# Altium PCB PCB2.PcbDoc
Units mil, origin at the board's own origin, x right, y up, seen from the top; angles counter-clockwise.
Board outline 6000 x 4000 mil, 2 copper layers (Top Layer, Bottom Layer); 31 components, 30 nets, 108 pads, 17 vias.
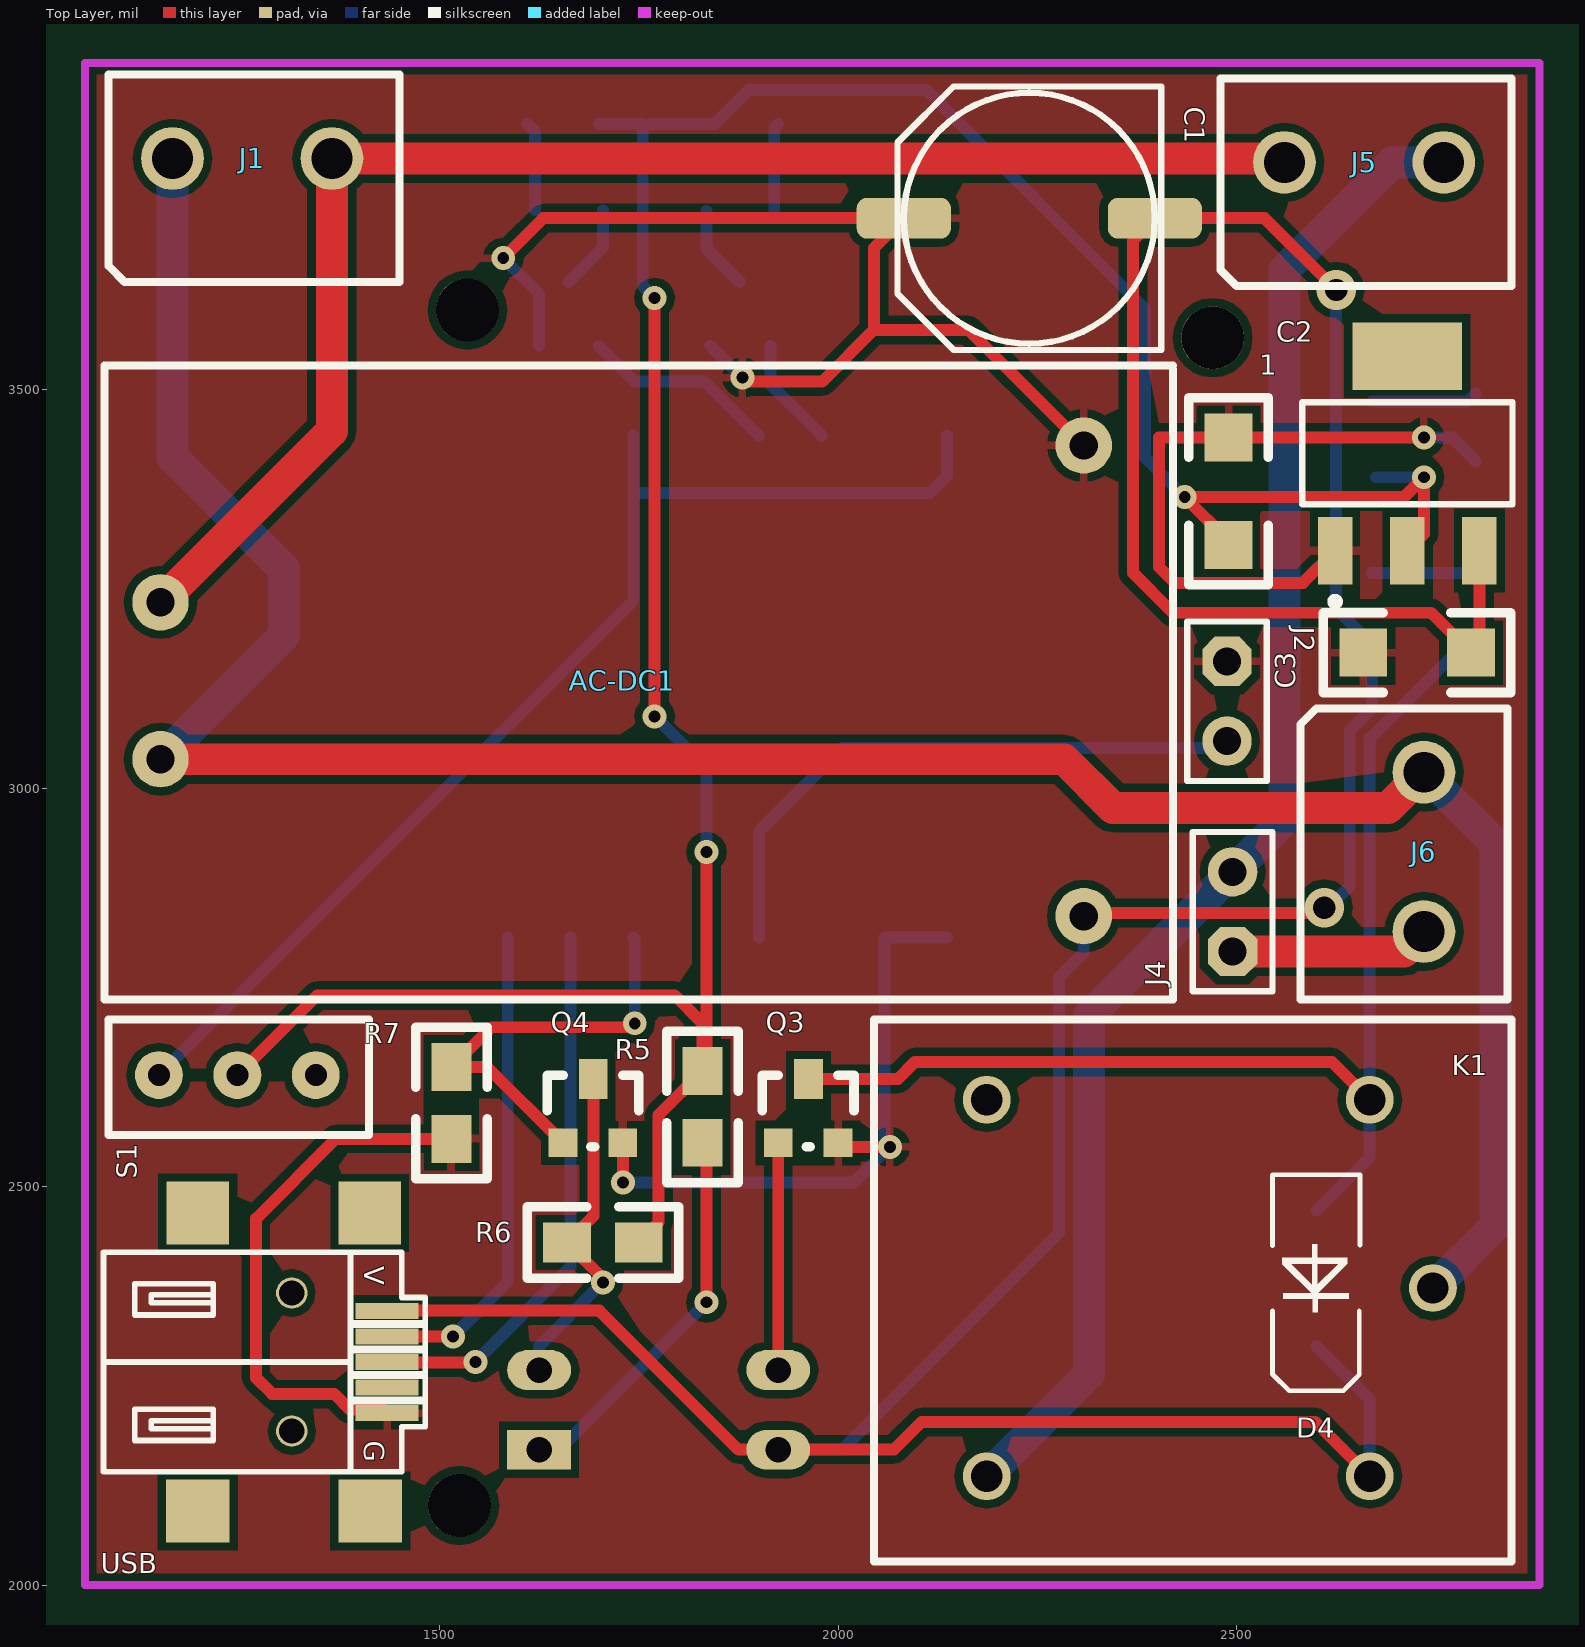
[diagram p0: Top Layer view]
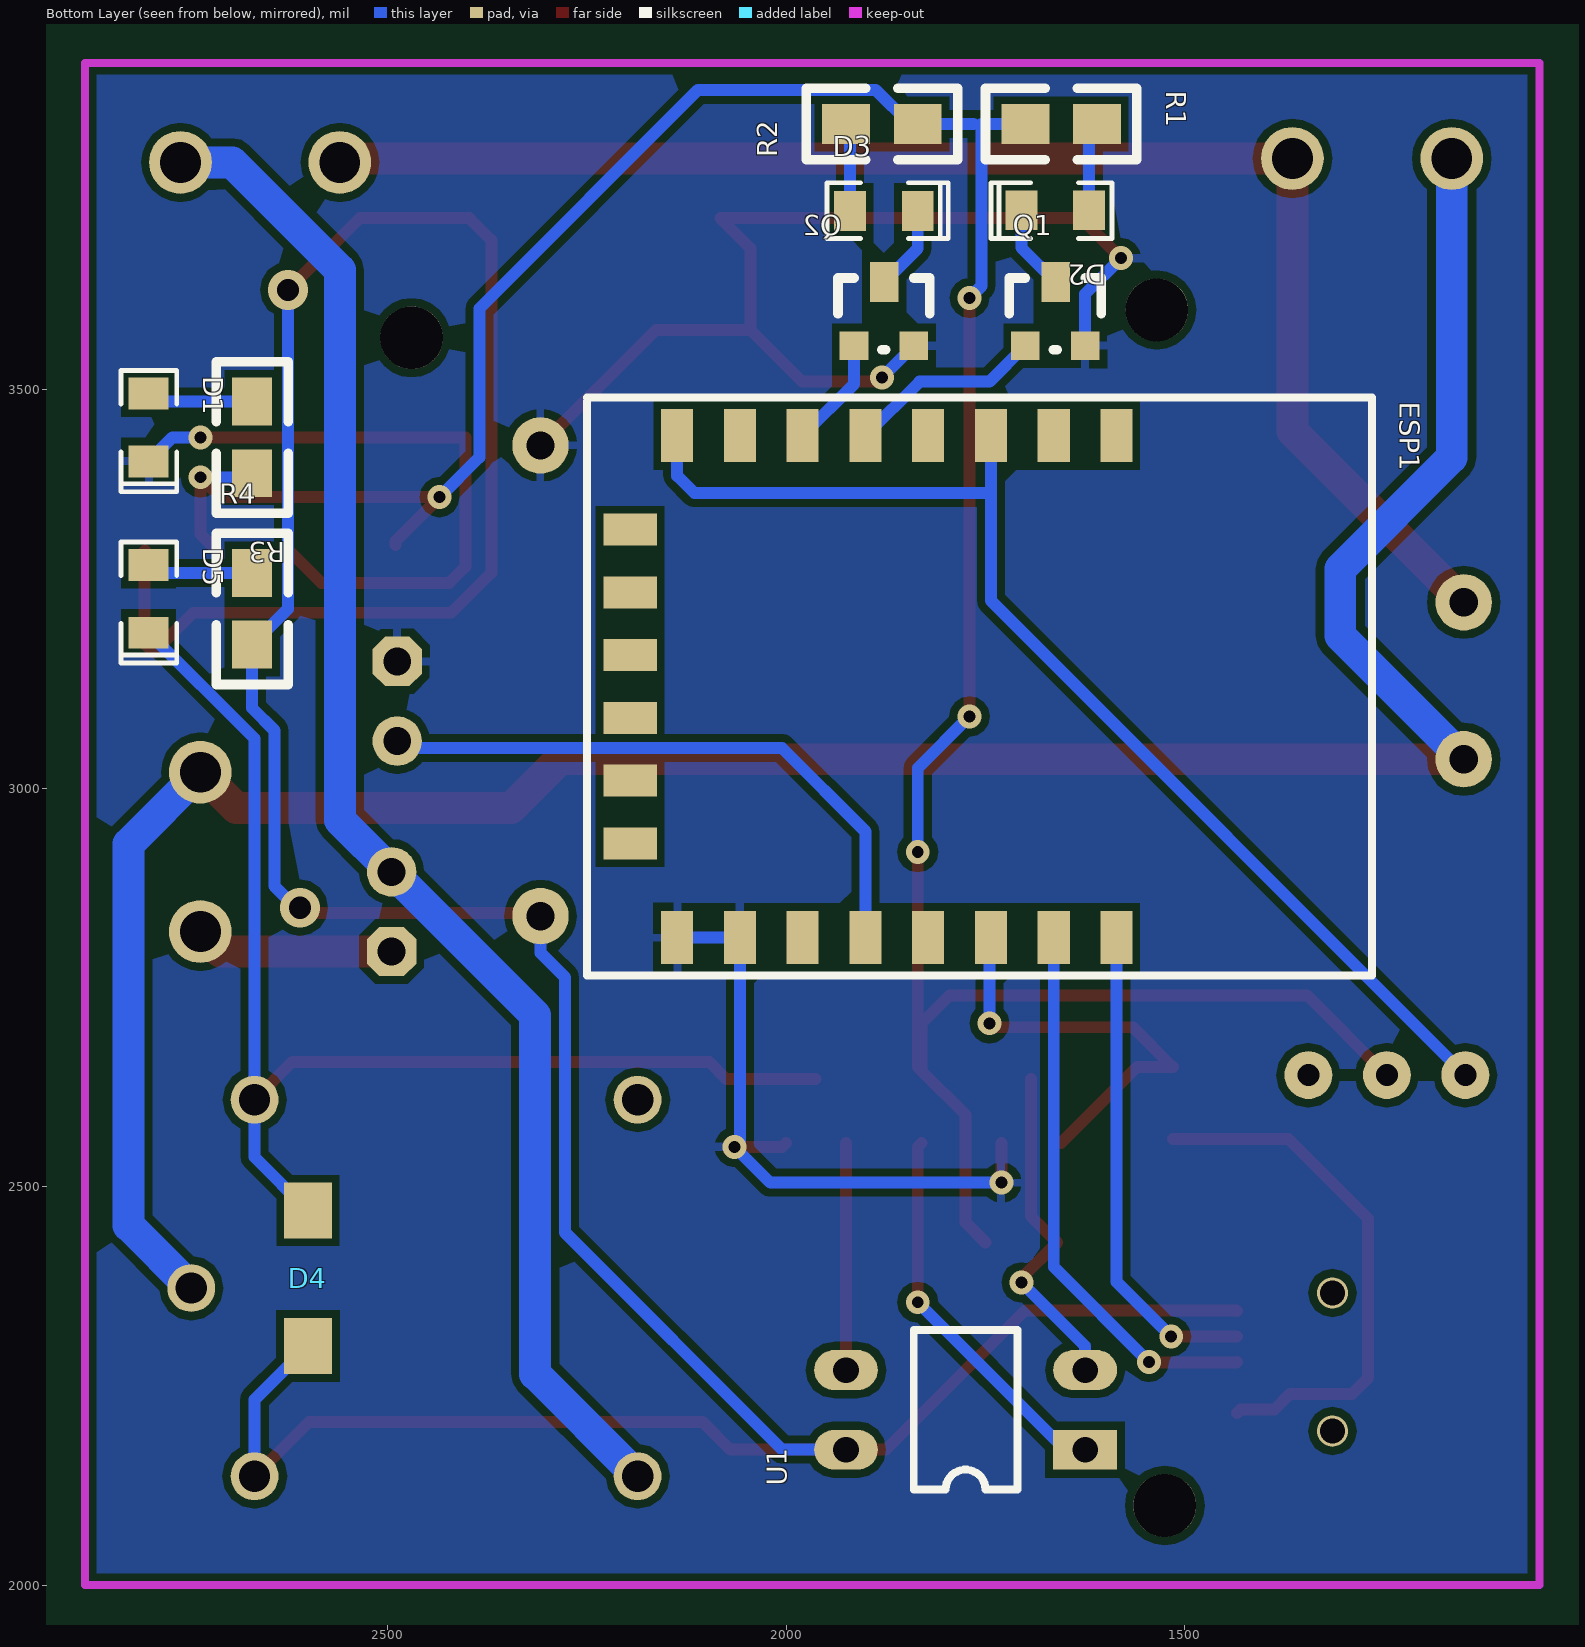
[diagram p1: Bottom Layer view, seen from below]

## Layer stack, top to bottom
Top Solder: solder mask 0.4, Solder Resist, Dk 3.5
Top Layer: signal copper 1.4
Dielectric 1: dielectric 12.6, FR-4, Dk 4.8
Bottom Layer: signal copper 1.4
Bottom Solder: solder mask 0.4, Solder Resist, Dk 3.5

## Board outline
1000,1000 7000,1000 7000,5000 1000,5000

## Design rules (kind name [scope] priority, off if disabled: settings)
Clearance [All] p1: gap=10
PolygonConnect [All] p1: connectstyle=Relief reliefconductorwidth=10 reliefentries=4 polygonreliefangle="90 Angle" airgapwidth=10
RoutingVias [All] p1: holewidth=28 width=50 viastyle="Through Hole" minholewidth=10 minwidth=10 maxholewidth=28 maxwidth=50
SolderMaskExpansion [All] p1: expansion=4
Width [All] p1: maxlimit=100 minlimit=10 preferedwidth=10
29 further rules are at their usual default settings.

## Components (designator, comment, footprint, x,y, rotation, side; value= is the part's Value field where it differs from the comment)
1 "AMS1117" SOT223 2714.17,3420 r0 top
AC-DC1 "220—5" POWER-220_5 1745,3145 r0 top
C1 "Cap" "CAP-E SMD 8X8" 2240,3715 r0 top
C2 "Cap" 1206 2490,3305 r90 top
C3 "Cap" 1206 2794,3170 r180 top
D1 "LED0" LED0805 2800,3495 r270 bottom
D2 "LED0" LED0805 1620,3725 r0 bottom
D3 "LED0" LED0805 1920,3724.21 r180 bottom
D4 "1N5819" DO-214AC/SMA 2600,2385 r270 top
D5 "LED1" LED0805 2800,3280 r270 bottom
ESP1 "ESP8266-12E" ESP8266 1625,3285 r270 bottom
J1 "CON2" TML-2-5.08 1475,3315 r180 top
J2 "CON2" HDR1X2 2488,3159 r270 top
J4 "CON2" HDR1X2 2495,2795 r90 top
J5 "CON2" TML-2-5.08 2870,3310 r180 top
J6 "CON2" TML-2-5.08 2260,2710 r90 top
K1 "Relay-SPDT" 5V-5 2705,2550 r270 top
Q1 "SS8050" SOT-23 1700,3555 r180 bottom
Q2 "SS8050" SOT-23 1915,3555 r180 bottom
Q3 "SS8050" SOT-23 1925,2555 r0 top
Q4 "SS8050" SOT-23 1655,2555 r0 top
R1 "Res" 0805 1700,3833.29 r180 bottom
R2 "Res" 0805 1835,3833.29 r0 bottom
R3 "Res" 0805 2670,3485 r270 bottom
R4 "Res" 0805 2670,3180 r90 bottom
R5 "Res" 0805 1830,2555 r90 top
R6 "Res" 0805 1660,2430 r0 top
R7 "Res" 0805 1515,2560 r90 top
S1 "SW-SPDT" SS12D00G3 1246.42,2640 r180 top
U1 "Optoisolator1" DIP4 1625,2170 r0 bottom
USB "USB" USB-MINI 1270.31,2280 r270 top (schematic designator USB1)

## Footprints (in the part's own frame and the unit in brackets; to place one, negate y for a bottom-side part, rotate by r counter-clockwise, add the part's x,y. Pads: shape width x height; smd on the part's side, far side on the other; paste and mask are expansions set on the pad)
5V-5 [mm]
  round 1.524 hole 1: 1(4.5,1.05) 2(-1.5,-0.965) 3(10.5,-0.965) 4(-1.5,-13.17) 5(10.5,-13.17)
  silkscreen extent -4.06,-16.76 13.21,3.56
0805 [mil]
  rect 60x50 smd: 1(0,0) 2(90,0)
  silkscreen extent -50,-45 140,45
1206 [mil]
  rect 60x60 smd: 1(0,0) 2(135,0)
  silkscreen extent -50,-50 185,50
"CAP-E SMD 8X8" [mm]
  rrect50% 3x1.3 smd: 1(-4,0) 2(4,0)
  silkscreen extent -4.2,-4.2 4.2,4.2, body extent -4.52,-4.22 4.48,4.08, height 10.5
DIP4 [mil]
  rect 80x50 hole 32: 1(0,0)
  oval 80x50 hole 32: 2(0,-100) 3(300,-100) 4(300,0)
  silkscreen extent 85,-150 215,50
DO-214AC/SMA [mil]
  rect 70x60 smd far side: 1(-85,0) 2(85,0)
  silkscreen extent -130,-55 141,55
ESP8266 [mm]
  rect 1.7x1.02 smd: 1(-4,1) 2(-4,-1) 3(-4,-3) 4(-4,-5) 5(-4,-7) 6(-4,-9) 7(-4,-11) 8(-4,-13) 15(12,-13) 16(12,-11) 17(12,-9) 18(12,-7) 19(12,-5) 20(12,-3) 21(12,-1) 22(12,1)
  rect 1.02x1.7 smd: 9(-1,-14.5) 10(1,-14.5) 11(3,-14.5) 12(5,-14.5) 13(7,-14.5) 14(9,-14.5)
  silkscreen extent -5.21,-15.88 13.21,9.14
HDR1X2 [mil]
  oct 62x62 hole 35: 1(0,0)
  round 62 hole 35: 2(100,0)
  silkscreen extent -50,-50 150,50
LED0805 [mil]
  rect 40x50 smd: 1(0,0) 2(85,0)
  silkscreen extent -29,-35 123,35, body extent 3,-24 83,25, height 43
POWER-220_5 [mm]
  round 1.8 hole 0.9: 1(-15.113,-2.762) 2(-15.113,2.238) 3(14.307,-7.762) 4(14.307,7.238)
  silkscreen extent -16.89,-10.41 17.14,9.78
SOT223 [mm] "SOT-223/SC-73; 4 Leads; Body 6.7 x 7.3 mm, inc. leads (LxW max)"
  rect 1.1x2.15 smd: 1(-2.3,-3.1) 2(0,-3.1) 3(2.3,-3.1)
  rect 3.5x2.15 smd: 4(0,3.1)
  silkscreen extent -3.35,-4.85 3.35,1.63
SOT-23 [mil]
  rect 36x36 smd: 1(0,0) 2(75,0)
  rect 36x50 smd: 3(38,80)
  silkscreen extent -20,-5 95,85
SS12D00G3 [mil]
  round 60 hole 27.56: 1(-98.43,0) 2(0,0) 3(98.43,0)
  silkscreen extent -165,-70 161,75
TML-2-5.08 [mm]
  round 2 hole 1.3: 1(2.794,-12.065) 2(7.874,-12.065)
  silkscreen extent 0.64,-14.73 9.91,-8.13
USB-MINI [mm]
  rect 2x2 smd: 0(-4.746,3.612) 0(-4.746,-1.872)
  round 1 hole 0.8: 0(-2.2,1.128) 0(2.2,1.128)
  rect 2x2.032 smd: 0(4.746,3.628) 0(4.746,-1.872)
  rect 0.52x2 smd: 1(-1.626,4.166) 2(-0.813,4.166) 3(0,4.166) 4(0.813,4.166) 5(1.626,4.166)
  silkscreen extent -3.5,-4.87 3.5,5.38, body extent -5.32,-4.63 5.38,4.57, height 3.95

## Part data
C1 C2 C3: "Capacitor"
D1 D2 D3: "Typical INFRARED GaAs LED"
D4: library part Diode, "Default Diode"
D5: "Typical RED GaAs LED"
ESP1: library part ESP8266
J1 J2 J4 J5 J6: "Connector"
K1: "Single-Pole Dual-Throw Relay"
Q1 Q2 Q3 Q4: library part 2N3904, "NPN General Purpose Amplifier"
R1 R2 R3 R4 R5 R6 R7: "Resistor"
S1: "SPDT Subminiature Toggle Switch, Right Angle Mounting, Vertical Actuation"
U1: "4-Pin Phototransistor Optocoupler"
USB: library part miniUSB-b

## Free pads (board coordinates)
  round 78.74 hole 78.74: ""(1525,2100) ""(1535,3600) ""(2470,3565)

## Via types
v1: diameter 30, hole 15, Top Layer to Bottom Layer, 15 vias
v2: diameter 50, hole 28, Top Layer to Bottom Layer, 2 vias

## Nets (pads, with @x,y where several pads share a name; then routed paths per layer and width w, separated by ;. In a path a pad name is that pad's centre, name@x,y a point inside that pad or via, vN(x,y) a via of type N, cw(c..) or ccw(c..) an arc to the next point about the centre after c; other vN are vias at no path point)
220L: AC-DC1.1 J1.2 J6.2 K1.1 | length 3222
  Top Layer w40: AC-DC1.1 2283.74,3036.26 2345,2975 2690,2975 J6.2
  Bottom Layer w40: AC-DC1.1 1305,3191.26 1305,3275 1165,3415 J1.2 ; J6.2 2825,2930 2825,2451.5 K1.1
220L_OUT: J4.2 J5.1 K1.5 | length 1924
  Bottom Layer w40: K1.5 2315,2265.12 2315,2715 J4.2 2560,2960 2560,3650 2695,3785 J5.1
220N: AC-DC1.2 J1.1 J5.2 | length 1843
  Top Layer w40: AC-DC1.2 1365,3448.11 J1.1 2555,3790 J5.2
ADC: ESP1.1
GND: 1.1 AC-DC1.4 C1.1 C2.2 C3.2 D1.2 ESP1.15 ESP1.16 J2.1 Q1.2 Q2.2 Q3.2 Q4.2 R7.1 USB.5 | length 3683.7
  Top Layer w15: USB.5 1430.04,2220.26 1387.69,2220.26 1367.95,2240 1290,2240 1270,2260 1270,2460 1370,2560 R7.1 ; v1(1580,3665) 1630,3715 C1.1 2045,3677.48 2045,3575 ; v1(1730,2505) Q4.2 ; v1(1880,3515) 1885,3510 1980,3510 2045,3575 ; Q3.2 2005,2550 v1(2065,2550) ; AC-DC1.4 2163.23,3575 2045,3575 ; 1.1 2583.17,3257.5 2422.5,3257.5 2402.5,3277.5 2402.5,3440 C2.2 v1(2735,3440)
  Bottom Layer w15: v1(1580,3665) 1625,3620 Q1.2 ; v1(1730,2505) 2020,2505 v1(2065,2550) 2058.07,2556.93 ESP1.16 ESP1.15 ; Q2.2 v1(1880,3515) ; v1(2735,3440) 2770,3440 D1.2
IO0: ESP1.18 J2.2 | length 767.4
  Bottom Layer w15: ESP1.18 1900.59,2945.59 2005.57,3050.57 2479.57,3050.57 J2.2
IO2: ESP1.17
IO4: ESP1.19
IO5: ESP1.20 Q4.1 R7.2 | length 540.5
  Top Layer w15: Q4.1 1560,2650 R7.2 1565,2700 1740,2700 v1(1745,2705)
  Bottom Layer w15: ESP1.20 1745,2810.67 v1(1745,2705)
IO12: ESP1.6 Q2.1 | length 139.2
  Bottom Layer w15: Q2.1 1915,3506.81 ESP1.6
IO13: ESP1.7
IO14: ESP1.5 Q1.1 | length 247.2
  Bottom Layer w15: Q1.1 1745,3510 1832.62,3510 1900.14,3442.48 ESP1.5
IO16: ESP1.4
NetD1_1: D1.1 R3.1 | length 134.1
  Bottom Layer w15: R3.1 2790,3485 D1.1
NetD2_1: D2.1 R1.2 | length 112.4
  Bottom Layer w15: R1.2 1620,3823.29 D2.1
NetD2_2: D2.2 Q1.3 | length 107.8
  Bottom Layer w15: Q1.3 1705,3678 D2.2
NetD3_1: D3.1 R2.2 | length 111.1
  Bottom Layer w15: D3.1 1920,3828.29 R2.2
NetD3_2: D3.2 Q2.3 | length 106.6
  Bottom Layer w15: D3.2 1835,3677 Q2.3
NetD4_1: D4.1 D5.2 K1.2 Q3.3 | length 1540.4
  Top Layer w15: Q3.3 2075,2635 2096.56,2656.56 2619.5,2656.56 K1.2
  Bottom Layer w15: D4.1 2667,2537 K1.2 2667,3062 D5.2
NetD5_1: D5.1 R4.2 | length 134.1
  Bottom Layer w15: R4.2 2790,3270 D5.1
NetESP1_3: ESP1.3 ESP1.8 S1.3 | length 1502.4
  Bottom Layer w15: S1.3 1743.11,3235.12 1743.11,3370 ; ESP1.3 1743.11,3370 ; ESP1.8 2136.81,3391.81 2115,3370 1743.11,3370
NetQ3_2: Q3.1 U1.3 | length 285
  Top Layer w15: U1.3 Q3.1
NetQ4_3: Q4.3 R6.1 U1.2 | length 430.4
  Top Layer w15: Q4.3 1693,2463 R6.1 1705,2385 v1(1705,2380)
  Bottom Layer w15: U1.2 1625,2300 v1(1705,2380)
NetR5_1: R5.1 U1.1 | length 488.7
  Top Layer w15: R5.1 1835,2550 v1(1835,2355)
  Bottom Layer w15: U1.1 1650,2170 v1(1835,2355)
OTHER_OUT: J4.1 J6.1 | length 250.4
  Top Layer w40: J4.1 2710,2795 J6.1
RST: ESP1.2
RXD: ESP1.21 USB.3 | length 693.1
  Top Layer w15: USB.3 1434.81,2279.5 1544.5,2279.5 v1(1545,2280)
  Bottom Layer w15: v1(1545,2280) 1664.37,2399.37 ESP1.21
TXD: ESP1.22 USB.2 | length 611.7
  Top Layer w15: USB.2 v1(1517,2312)
  Bottom Layer w15: v1(1517,2312) 1585.63,2380.63 ESP1.22
VCC_3.3V: 1.2 C2.1 R1.1 R2.1 R3.2 R5.2 R6.2 S1.2 | length 3788.4
  Top Layer w15: S1.2 1346.42,2740 1795,2740 1830,2705 R5.2 ; R6.2 1775,2455 1775,2590 R5.2 ; v1(1770,3090) v1(1770,3615) ; v1(1835,2920) 1835,2650 R5.2 ; C2.1 2490,3310 v1(2435,3365) 2710,3365 v1(2735,3390) 2735,3318.78 1.2
  Bottom Layer w15: R1.1 1755,3833.29 1755,3630 v1(1770,3615) ; 1765,3833.29 R2.1 1845.25,3833.29 1887.75,3875.79 2110.79,3875.79 2385,3601.58 2385,3415 v1(2435,3365) ; v1(1770,3090) 1835,3025 v1(1835,2920) ; R3.2@2675,3390 v1(2735,3390)
VCC_5V: 1.3 AC-DC1.3 C1.2 C3.1 D4.2 K1.3 R4.1 U1.4 USB.1 | length 4864.5
  Top Layer w15: USB.1 1434.81,2344.5 1700.5,2344.5 1875,2170 U1.4 2070,2170 2105,2205 2598.62,2205 K1.3 ; AC-DC1.3 2312.36,2843.5 2603.5,2843.5 v2(2610,2850) ; v2(2625,3625) 2535,3715 C1.2 2370,3687.52 2370,3270 2420,3220 2744,3220 C3.1 2805,3181 2805,3297.68 1.3
  Bottom Layer w15: U1.4 2005,2170 2277.5,2442.5 2277.5,2762.5 2308.27,2793.27 AC-DC1.3 ; D4.2 2667.01,2232.99 K1.3 ; v2(2610,2850) 2615,2850 2642,2877 2642,3072.36 2670,3100.36 R4.1 2625,3225 2625,3295 ; v2(2625,3625) 2625,3295 ; 2627.5,3297.5 2625,3295
pads on no net: 1.4 ESP1.9 ESP1.10 ESP1.11 ESP1.12 ESP1.13 ESP1.14 K1.4 S1.1 USB.0 USB.4

## Polygon pours and split planes (outlines as drawn)
GND on Bottom Layer "Top Layer" (solid, remove dead copper, pour order 28): 1055,3905 1055,2000 2870,2000 2880,2010 2870,2020 2870,3910
GND on Top Layer "Top Layer" (solid, remove dead copper, pour order 30): 2870,3910 2870,2020 2880,2010 1055,2010 1055,3910

## Keep-outs
Keep-Out Layer:
  lines w10: 1055,2000 2880,2000 2880,3910 1055,3910 1055,2000

## Text inside footprints (layer, text, board x,y; h text height)
USB: Top Overlay "G" at 1405.31,2181 h25 r270; Top Overlay "V" at 1405.31,2400 h25 r270